# Altium PCB Robonaut_main.PcbDoc
Units mm, origin at the board's own origin, x right, y up, seen from the top; angles counter-clockwise.
Board outline 110 x 130 mm, 2 copper layers (Top Layer, Bottom Layer), stack 1.586 mm thick; 55 components, 58 nets, 322 pads, 113 vias.
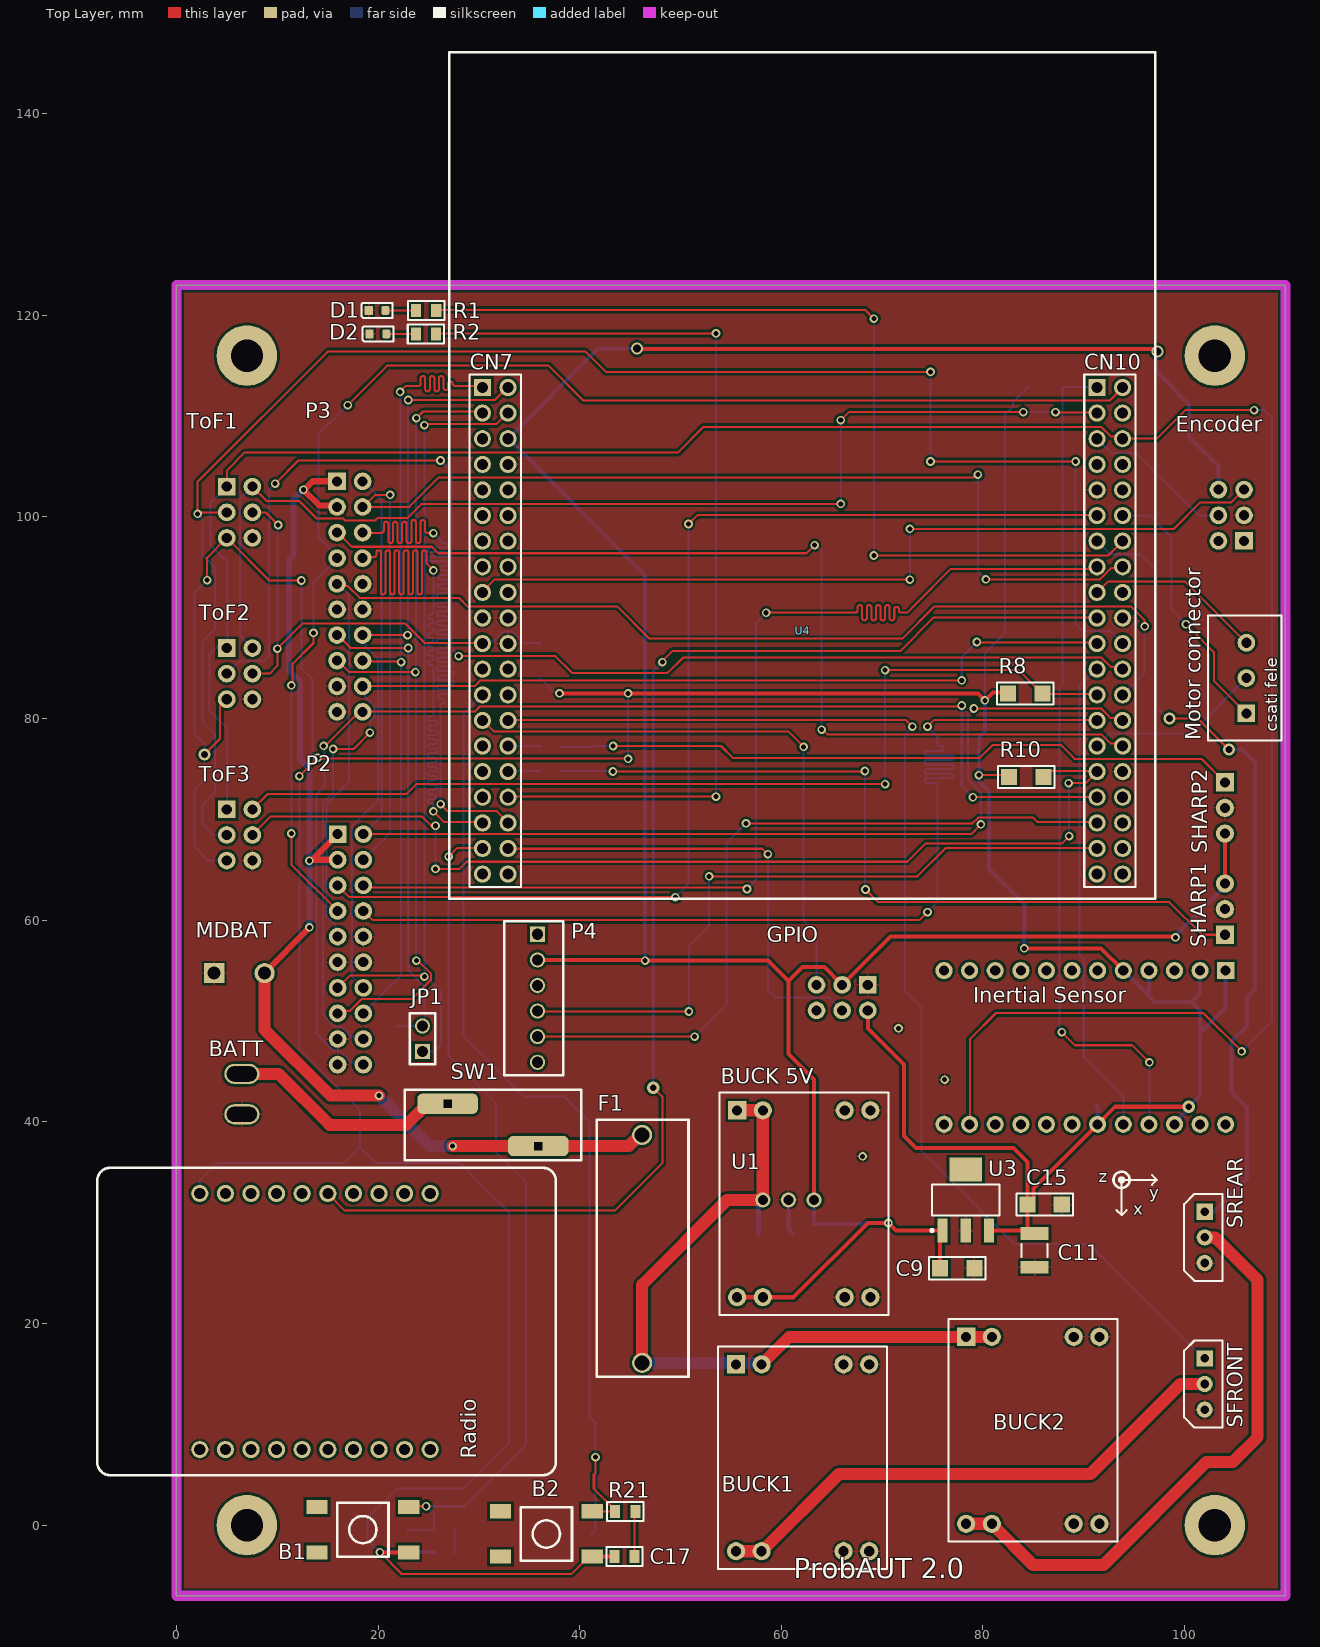
[diagram p0: Top Layer view]
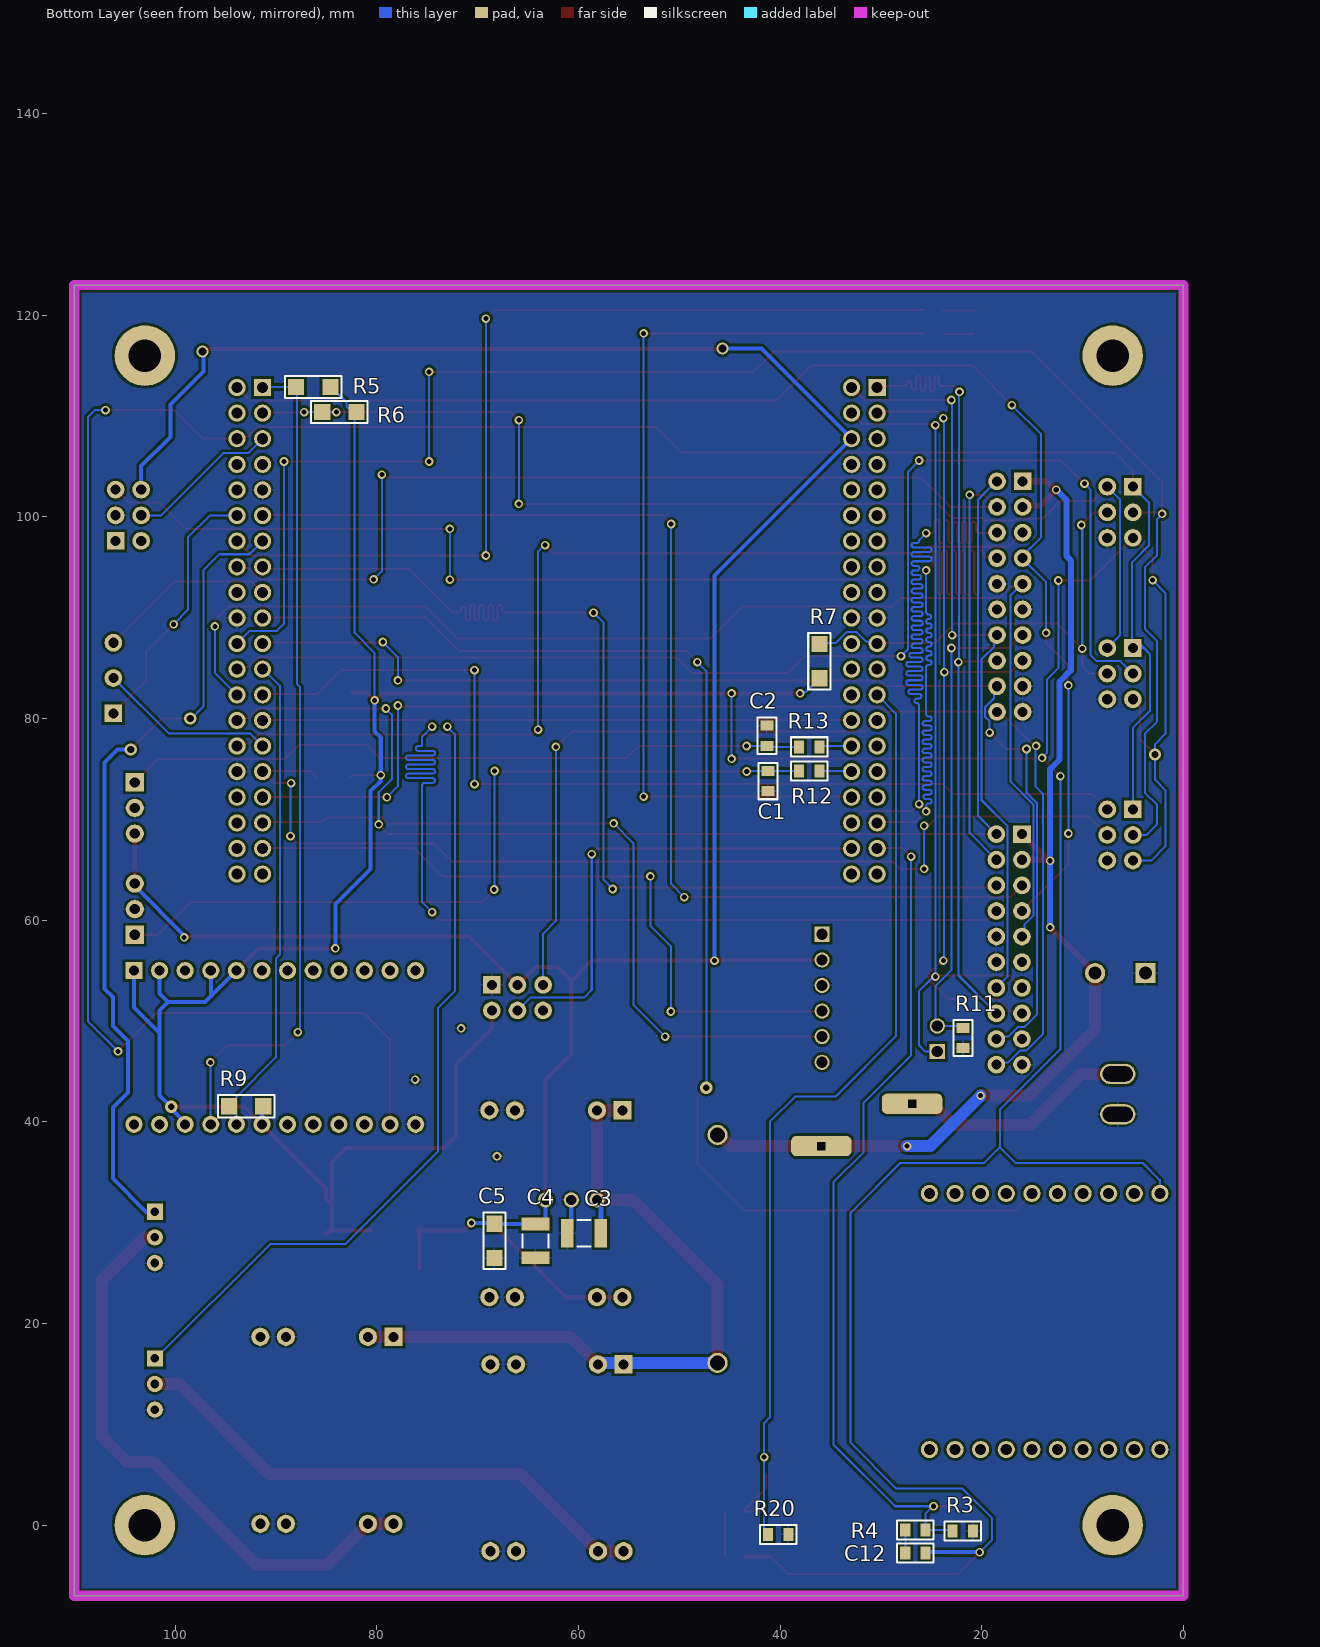
[diagram p1: Bottom Layer view, seen from below]
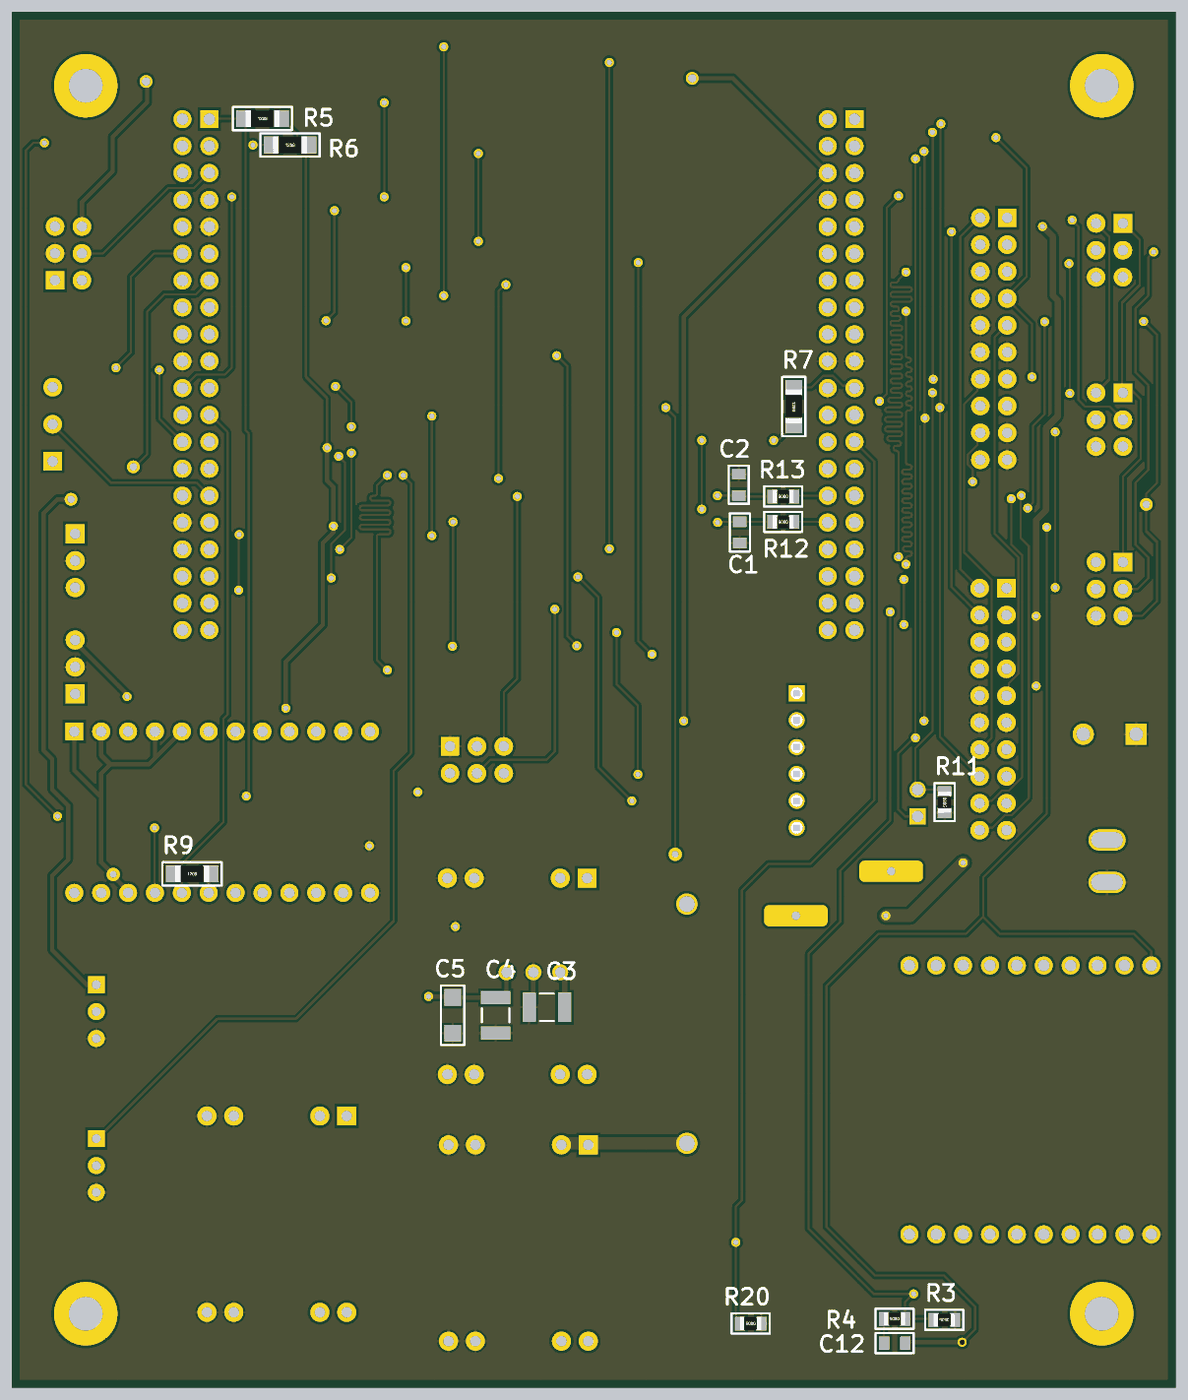
[diagram p2: 3D render of the assembled board from below, using the file's embedded part models]

## Layer stack, top to bottom
Top Solder: solder mask 0.0102, Solder Resist, Dk 3.5
Top Layer: signal copper 0.018
Dielectric1: core 1.55, FR-4, Dk 4.8
Bottom Layer: signal copper 0.018
Bottom Solder: solder mask 0.0102, Solder Resist, Dk 3.5

## Board outline
0,-7 110,-7 110,123 0,123

## Design rules (kind name [scope] priority, off if disabled: settings)
BoardOutlineClearance [All] p1: gap=0.25 ignorepadtopadclearanceinfootprint=FALSE except(0: Arc-SplitContinuation Track-SplitContinuation SMDPad-SplitContinuation THPad-SplitContinuation Via-SplitContinuation Fill-SplitContinuation Poly-SplitContinuation Region-SplitContinuation Text-SplitContinuation)
Clearance poly_clearance [InNamedPolygon('top_GND') Or InNamedPolygon('bottom_GND')] p1: gap=0.254 ignorepadtopadclearanceinfootprint=FALSE except(0: Arc-Hole Track-Hole SMDPad-Hole THPad-Hole Via-Hole Fill-Hole Poly-Hole Region-Hole Text-Hole)
Clearance Clearance-xPP-xTP-xTT [All] p2: gap=0.15 ignorepadtopadclearanceinfootprint=TRUE except(0: Arc-Hole Track-Hole SMDPad-Hole THPad-Hole Via-Hole Fill-Hole Poly-Hole Region-Hole Text-Hole)
ComponentClearance [All] p1: gap=0.25 collisioncheckmode=3 verticalgap=0.25 showdistances=FALSE
DiffPairsRouting [All] p1: maxlimit=0.25 minlimit=0.25 mostfreqgap=0.25 toplayer_minwidth=0.381 toplayer_maxwidth=0.381 toplayer_prefwidth=0.381 bottomlayer_minwidth=0.381 bottomlayer_maxwidth=0.381 bottomlayer_prefwidth=0.381 maxuncoupledlength=12.5
Height [All] p1: minheight=0 maxheight=25 prefheight=12.5
HoleSize HoleSize-PTH [All] p1: absolutevalues=TRUE maxlimit=2 minlimit=0.25 maxpercent=80.000 minpercent=20.000
HoleToHoleClearance [All] p1: gap=0.35 allowstackedmicrovias=TRUE
MinimumAnnularRing "Minimum IAR  >0.45mm" [((ObjectKind = 'Pad') OR (ObjectKind = 'Via')) And (Layer = 'MultiLayer') And (HoleDiameter > AsMM(0.45))] p1: minimumring=0.175 // minimum inner annular ring for pads > 0.45mm finished hole size
MinimumAnnularRing "Minimum IAR <=0.45mm" [((ObjectKind = 'Pad') OR (ObjectKind = 'Via')) And (Layer = 'MultiLayer') And (HoleDiameter <= AsMM(0.45))] p2: minimumring=0.175 // minimum inner annular ring for pads <= 0.45mm finished hole size
MinimumSolderMaskSliver [All] p1: minsoldermaskwidth=0.08
PlaneClearance PlaneClearance-IPI [All] p1: clearance=0.25
PlaneConnect [All] p1: planeconnectstyle=Relief reliefexpansion=0.175 reliefentries=4 reliefconductorwidth=0.2 reliefairgap=0.2
PolygonConnect PolygonConnect-xTW [All] p1: connectstyle=Relief reliefconductorwidth=0.2 reliefentries=4 polygonreliefangle="90 Angle" airgapwidth=0.2
RoomDefinition U_main_board [InComponentClass('U_main_board')] p1: confinementstyle=ConfineIn formatcopy=TRUE lockcomponents=FALSE outline -250,-250 -199.2,-250 -199.2,-224.6 -250,-224.6
RoomDefinition U_I2C [InComponentClass('U_I2C')] p2: confinementstyle=ConfineIn formatcopy=TRUE lockcomponents=FALSE outline -250,-250 -199.2,-250 -199.2,-224.6 -250,-224.6
RoomDefinition U_Connectors [InComponentClass('U_Connectors')] p3: confinementstyle=ConfineIn formatcopy=TRUE lockcomponents=FALSE outline -250,-250 -199.2,-250 -199.2,-224.6 -250,-224.6
RoomDefinition U_Power [InComponentClass('U_Power')] p4: confinementstyle=ConfineIn formatcopy=TRUE lockcomponents=FALSE outline -250,-250 -199.2,-250 -199.2,-224.6 -250,-224.6
RoutingCorners [All] p1: cornerstyle=45-Degree minsetback=2.5 maxsetback=2.5
RoutingVias "RoutingVias > 0.45mm" [(ObjectKind = 'Via') And (HoleDiameter > AsMM(0.45))] p1: holewidth=0.5 width=0.85 viastyle="Through Hole" minholewidth=0.5 minwidth=0.85 maxholewidth=0.9 maxwidth=1.25 // finishet hole size > 0.45mm
RoutingVias "RoutingVias <= 0.45mm" [(ObjectKind = 'Via') And (HoleDiameter <= AsMM(0.45))] p2: holewidth=0.3 width=0.65 viastyle="Through Hole" minholewidth=0.25 minwidth=0.6 maxholewidth=0.45 maxwidth=0.8 // finishet hole size <= 0.45mm
SilkToSilkClearance [All] p1: silktosilkclearance=0.2
SilkToSolderMaskClearance SilkscreenOverComponentPads [IsPad] p1: minsilkscreentomaskgap=0.2 clearancetoexposedcopper=TRUE
SolderMaskExpansion [All] p1: expansion=0 istentingtop=FALSE
UnRoutedNet [All] p1: checkbadconnections=TRUE
Width Width-xTW [All] p1: maxlimit=1.5 minlimit=0.15 preferedwidth=0.2
18 further rules are at their usual default settings.

## Classes and differential pairs
component class U_Power: BATT BUCK1 BUCK2 "BUCK 5V" C3 C4 C5 C9 C11 C15 F1 SW1 U1 U3
component class U_main_board: B1 B2 C12 C17 D1 D2 JP1 P2 P3 P4 R1 R2 R3 R4 R5 R6 R7 R8 R9 R10 R11 R20 R21 U4
component class U_I2C: "Inertial Sensor" ToF1 ToF2 ToF3
component class U_Connectors: C1 C2 Encoder GPIO MDBAT "Motor connector" R12 R13 Radio SFRONT SHARP1 SHARP2 SREAR

## Components (designator, comment, footprint, x,y, rotation, side; value= is the part's Value field where it differs from the comment)
B1 "Button" FP_BTN_SMD 18.5,-0.45 r90 top
B2 "Button" FP_BTN_SMD 36.7,-0.875 r90 top
BATT "Connector_Battery" CONN_BATT_LiPo_ 6.5,39.75 r270 top
BUCK1 "BUCK" BUCK 55.515,-1.825 r0 top
BUCK2 "BUCK" BUCK 78.34,0.9 r0 top
"BUCK 5V" "BUCK" BUCK 55.626,23.368 r0 top
C1 "100nF" FP_0805_CAP_085 41.2,73.8 r90 bottom
C2 "100nF" FP_0805_CAP_085 41.3,78.3 r270 bottom
C3 "10uF" FP_1210_CAP 59.436,28.956 r180 bottom
C4 "22uF" FP_1210_CAP 64.262,28.194 r90 bottom
C5 "100nF" FP_1206_CAP_125 68.326,28.194 r90 bottom
C9 "1uF" FP_1206_CAP_125 77.45,25.475 r180 top
C11 "22uF" FP_1210_CAP 85.125,27.25 r90 top
C12 "100nF" FP_0805_CAP_085 26.575,-2.775 r180 bottom
C15 "100nF" FP_1206_CAP_125 86.125,31.8 r180 top
C17 "100nF" FP_0805_CAP_085 44.45,-3.125 r180 top
D1 "LED" FP_0805_LED_RED 19.907,120.487 r180 top
D2 "LED" FP_0805_LED_RED 20,118.15 r180 top
Encoder "Connector" FP_CONN6PIN_2X3_254 105.9,102.705 r180 top
F1 "Fuse 5A" PTF/16_FUSE_HOLDER 46.2,23.7 r270 top
GPIO "Connector" FP_CONN6PIN_2X3_254 63.5,53.594 r270 top
"Inertial Sensor" "STEVAL-MKI178V1" STEVAL-MKI178V1 76.14,55 r270 top
JP1 "JUMPER" FP_CONN2_TUSKE_254MM 24.4,46.975 r0 top
MDBAT "Connector" CONN_2pin 8.75,54.75 r90 top
"Motor connector" "Connector" "sorkapocs 3 pin" 106.125,80.525 r90 top
P2 "Line Sensor Front" FP_CONN20PINS_LOMEX 16,68.54 r0 top
P3 "Line Sensor Rear" FP_CONN20PINS_LOMEX 15.935,103.53 r0 top
P4 "HC-05" FP_CONN6_TAP_254MM 35.825,58.61 r180 top
R1 "200" FP_0805_RES 24.775,120.475 r0 top
R2 "200" FP_0805_RES 24.75,118.15 r0 top
R3 "10K" FP_0805_RES 21.875,-0.575 r0 bottom
R4 "1K" FP_0805_RES 26.575,-0.475 r0 bottom
R5 "4K7" FP_1206_RES 86.3,112.9 r180 bottom
R6 "4K7" FP_1206_RES 83.7,110.4 r180 bottom
R7 "4K7" FP_1206_RES 36.1,85.7 r270 bottom
R8 "4K7" FP_1206_RES 84.2,82.5 r180 top
R9 "4K7" FP_1206_RES 92.951,41.55 r180 bottom
R10 "4K7" FP_1206_RES 84.3,74.2 r0 top
R11 "1K" FP_0805_RES 21.85,48.325 r270 bottom
R12 "1K" FP_0805_RES 37.1,74.8 r0 bottom
R13 "1K" FP_0805_RES 37.1,77.2 r0 bottom
R20 "10K" FP_0805_RES 40.175,-0.925 r0 bottom
R21 "1K" FP_0805_RES 44.525,1.35 r0 top
Radio "SLTB004A" SLTB004A 37.626,4.96 r90 top
SFRONT "SERVO connector" RC_SERVO_CONN 102,16.54 r270 top
SHARP1 "SHARP TOF" "SHARP TOF" 104,58.56 r90 top
SHARP2 "SHARP TOF" "SHARP TOF" 104,73.68 r270 top
SREAR "SERVO connector" RC_SERVO_CONN 102,31.08 r270 top
SW1 "Main" FP_SWITCH_4.8X0.8 31.4,39.7 r0 top
ToF1 "Connector" FP_CONN6PIN_2X3_254 5,97.92 r0 top
ToF2 "Connector" FP_CONN6PIN_2X3_254 5,81.92 r0 top
ToF3 "Connector" FP_CONN6PIN_2X3_254 5,65.92 r0 top
U1 "V7805-2000" V7805-2000_Buck 60.706,29.718 r270 top
U3 "MCP1755S-3302E/DB" MCP1755S-3302E/DB_LDO 78.3,32.25 r90 top
U4 "NUCLEO-F446RE" FP_NUCLEO-64_2x20 30.36,112.84 r0 top

## Footprints (in the part's own frame and the unit in brackets; to place one, negate y for a bottom-side part, rotate by r counter-clockwise, add the part's x,y. Pads: shape width x height; smd on the part's side, far side on the other; paste and mask are expansions set on the pad)
BUCK [mm]
  rect 1.8x1.8 hole 1: 1(0,17.78)
  round 1.8 hole 1: 2(2.54,17.78) 3(10.668,17.78) 4(13.208,17.78) 5(0,-0.762) 6(2.54,-0.762) 7(10.668,-0.762) 8(13.208,-0.762)
  silkscreen extent -1.78,-2.54 14.99,19.56
CONN_2pin [mm] "MKDS 3/ 2"
  rect 2x2 hole 1.3: 1(0,5)
  round 2 hole 1.3: 2(0,0)
CONN_BATT_LiPo_ [mm]
  oval 2x3.5 hole 1.5 slot 3 at 90 deg: 1(-5,0) 2(-1,0)
FP_0805_CAP_085 [mm] "0805 kapacitás YAGEO 0.85mm magas"
  rect 1x1.3 smd: 1(-1,0) 2(1,0)
  silkscreen extent -1.8,-0.95 1.8,0.95, body extent -1,-0.64 1.03,0.64, height 0.85
FP_0805_LED_RED [mm] "0805 méretű piros LED"
  rrect50% 0.8x0.9 smd: A(-0.825,0)
  rect 0.8x0.9 smd: K(0.825,0)
  silkscreen extent -1.55,-0.75 1.53,0.75, body extent -1,-0.62 1.02,0.62, height 1.1
FP_0805_RES [mm] "0805 ellenállás"
  rect 1x1.3 smd: 1(-1,0) 2(1,0)
  silkscreen extent -1.8,-0.95 1.8,0.95, body extent -1,-0.62 1,0.63, height 0.62
FP_1206_CAP_125 [mm] "1206 kapacitás 1.25 mm"
  rect 1.6x1.6 smd: 1(-1.7,0) 2(1.7,0)
  silkscreen extent -2.8,-1.1 2.8,1.1, body extent -1.52,-0.79 1.58,0.79, height 1.25
FP_1206_RES [mm] "1206 ellenállás"
  rect 1.6x1.6 smd: 1(-1.7,0) 2(1.7,0)
  silkscreen extent -2.8,-1.1 2.8,1.1, body extent -1.6,-0.8 1.6,0.8, height 0.62
FP_1210_CAP [mm] "CAP"
  rect 1.25x2.8 smd: 1(-1.675,0) 2(1.675,0)
  silkscreen extent -0.65,-1.3 0.65,1.3, body extent -1.75,-1.35 1.75,1.35, height 2.5
FP_BTN_SMD [mm] "SMD Push Button 6x6mm"
  rect 1.4x2.1 smd: 1(2.25,4.55) 2(2.25,-4.55) 3(-2.25,4.55) 4(-2.25,-4.55)
  silkscreen extent -2.67,-2.54 2.67,2.54, body extent -3,-5 3,5, height 5.1
FP_CONN2_TUSKE_254MM [mm] "2×1 tüskesor"
  rect 1.5x1.5 hole 1.1: 1(0,0)
  round 1.5 hole 1.1: 2(0,2.54)
  silkscreen extent -1.27,-1.27 1.27,3.81, body extent -1.27,-1.27 1.27,3.81, height 8.54
FP_CONN6_TAP_254MM [mm] "álló hat pólusú tápcsatlakozó 2.54mm"
  rect 1.5x1.5 hole 1.1: 1(0,0)
  round 1.5 hole 1.1: 2(0,2.54) 3(0,5.08) 4(0,7.62) 5(0,10.16) 6(0,12.7)
  silkscreen extent -2.54,-1.27 3.3,13.97, body extent -2.52,-1.27 3.28,13.97, height 11.56
FP_CONN6PIN_2X3_254 [mm] "6 pin csatlakozó 2 x 3 tüske"
  rect 1.75x1.75 hole 1: 1(0,5.08)
  round 1.75 hole 1: 2(2.54,5.08) 3(0,2.54) 4(2.54,2.54) 5(0,0) 6(2.54,0)
FP_CONN20PINS_LOMEX [mm]
  rect 1.75x1.75 hole 1: 1(0,0)
  round 1.75 hole 1: 2(2.54,0) 3(0,-2.54) 4(2.54,-2.54) 5(0,-5.08) 6(2.54,-5.08) 7(0,-7.62) 8(2.54,-7.62) 9(0,-10.16) 10(2.54,-10.16) 11(0,-12.7) 12(2.54,-12.7) 13(0,-15.24) 14(2.54,-15.24) 15(0,-17.78) 16(2.54,-17.78) 17(0,-20.32) 18(2.54,-20.32) 19(0,-22.86) 20(2.54,-22.86)
FP_NUCLEO-64_2x20 [mm]
  round 1.7 hole 1.1: 0(0,-48.26) 0(2.54,-48.26) 0(60.96,-48.26) 0(63.5,-48.26) 2(2.54,0) 3(0,-2.54) 4(2.54,-2.54) 5(0,-5.08) 6(2.54,-5.08) 7(0,-7.62) 8(2.54,-7.62) 9(0,-10.16) 10(2.54,-10.16) 11(0,-12.7) 12(2.54,-12.7) 13(0,-15.24) 14(2.54,-15.24) 15(0,-17.78) 16(2.54,-17.78) 17(0,-20.32) 18(2.54,-20.32) 19(0,-22.86) 20(2.54,-22.86) 21(0,-25.4) 22(2.54,-25.4) 23(0,-27.94) 24(2.54,-27.94) 25(0,-30.48) 26(2.54,-30.48) 27(0,-33.02) 28(2.54,-33.02) 29(0,-35.56) 30(2.54,-35.56) 31(0,-38.1) 32(2.54,-38.1) 33(0,-40.64) 34(2.54,-40.64) 35(0,-43.18) 36(2.54,-43.18) 37(0,-45.72) 38(2.54,-45.72) 40(63.5,0) 41(60.96,-2.54) 42(63.5,-2.54) 43(60.96,-5.08) 44(63.5,-5.08) 45(60.96,-7.62) 46(63.5,-7.62) 47(60.96,-10.16) 48(63.5,-10.16) 49(60.96,-12.7) 50(63.5,-12.7) 51(60.96,-15.24) 52(63.5,-15.24) 53(60.96,-17.78) 54(63.5,-17.78) 55(60.96,-20.32) 56(63.5,-20.32) 57(60.96,-22.86) 58(63.5,-22.86) 59(60.96,-25.4) 60(63.5,-25.4) 61(60.96,-27.94) 62(63.5,-27.94) 63(60.96,-30.48) 64(63.5,-30.48) 65(60.96,-33.02) 66(63.5,-33.02) 67(60.96,-35.56) 68(63.5,-35.56) 69(60.96,-38.1) 70(63.5,-38.1) 71(60.96,-40.64) 72(63.5,-40.64) 73(60.96,-43.18) 74(63.5,-43.18) 75(60.96,-45.72) 76(63.5,-45.72)
  rect 1.7x1.7 hole 1.1: 1(0,0) 39(60.96,0)
  silkscreen extent -3.3,-50.72 66.72,33.25, body extent -3.3,-50.72 66.72,33.25, height 11
FP_SWITCH_4.8X0.8 [mm]
  rrect50% 6x2 hole 0.8 square: 1(-4.5,2.1) 2(4.5,-2.1)
  silkscreen extent -8.75,-3.5 8.75,3.5
MCP1755S-3302E/DB_LDO [mm]
  rect 2.35x1 smd: 1(-3.025,2.3) 2(-3.025,0) 3(-3.025,-2.3)
  rect 2.35x3.25 smd: 4(3.025,0)
  silkscreen extent -3.15,-3.35 1.55,3.47, body extent -1.85,-3.35 1.85,3.35, height 1.8
PTF/16_FUSE_HOLDER [mm]
  round 2 hole 1.5: 1(-15,0) 2(7.6,0)
  silkscreen extent -16.5,-4.5 9,4.6
RC_SERVO_CONN [mm] "RC servo connector, 3 pin 2.54 mm gap, orientation signed"
  rect 1.6x1.6 hole 0.85: 1(0,0)
  round 1.6 hole 0.85: 2(2.54,0) 3(5.08,0)
  silkscreen extent -1.78,-2.03 6.86,1.78
"SHARP TOF" [mm]
  rect 1.8x1.8 hole 1: 1(0,0)
  round 1.8 hole 1: 2(2.54,0) 3(5.08,0)
SLTB004A [mm] "Thunderboard Sense 2 module"
  round 1.7 hole 1.1: 1(2.54,35.306) 2(27.94,35.306) 3(2.54,32.766) 4(27.94,32.766) 5(2.54,30.226) 6(27.94,30.226) 7(2.54,27.686) 8(27.94,27.686) 9(2.54,25.146) 10(27.94,25.146) 11(2.54,22.606) 12(27.94,22.606) 13(2.54,20.066) 14(27.94,20.066) 15(2.54,17.526) 16(27.94,17.526) 17(2.54,14.986) 18(27.94,14.986) 19(2.54,12.446) 20(27.94,12.446)
  Top Layer pour cut-out: -2.032,38.1 -2.032,47.752 32.512,47.752 32.512,38.1
  Bottom Layer pour cut-out: -2.032,38.1 -2.032,47.752 32.512,47.752 32.512,38.1
  silkscreen extent 0,0 30.48,45.47, body extent 0,0 30.5,45.5, height 8.7
"sorkapocs 3 pin" [mm] "be kell allitani a pin mereteket de kapasnak jo lesz"
  rect 1.75x1.75 hole 1: 1(0,0)
  round 1.75 hole 1: 2(3.5,0) 3(7,0)
  silkscreen extent -2.7,-3.5 9.7,3.8
STEVAL-MKI178V1 [mm] "DIL24"
  rect 1.7x1.7 hole 1: 1(0,27.94)
  round 1.7 hole 1: 2(0,25.4) 3(0,22.86) 4(0,20.32) 5(0,17.78) 6(0,15.24) 7(0,12.7) 8(0,10.16) 9(0,7.62) 10(0,5.08) 11(0,2.54) 12(0,0) 13(15.24,0) 14(15.24,2.54) 15(15.24,5.08) 16(15.24,7.62) 17(15.24,10.16) 18(15.24,12.7) 19(15.24,15.24) 20(15.24,17.78) 21(15.24,20.32) 22(15.24,22.86) 23(15.24,25.4) 24(15.24,27.94)
V7805-2000_Buck [mm]
  round 1.5 hole 1: 1(-2.54,-2.54) 2(-2.54,0) 3(-2.54,2.54)

## Part data
B1 B2: library part "Button 4P", "Push button", Reference=https://hu.mouser.com/ProductDetail/TE-Connectivity-Alcoswitch/FSM2JSMAATR?qs=g%252BEszo6zu8MKdISiZRITCQ%3D%3D, Supplier=Mouser
C1 C2 C3 C4 C5 C9 C11 C12 C15 C17: library part CAP, "Capacitor"
  C3: Reference=https://hu.farnell.com/kemet/c1210c106k3ractu/cap-10-f-25v-10-x7r-1210/dp/1358512, Supplier=Farnell
  C4 C11: ComponentLink1Description=Supplier, ComponentLink1URL=https://hu.farnell.com/kemet/c1210c226k4ractu/cap-22-f-16v-10-x7r-1210/dp/2456343, Reference=https://hu.farnell.com/kemet/c1210c226k4ractu/cap-22-f-16v-10-x7r-1210/dp/2456343, Supplier=Farnell
  C5 C15: ComponentLink1Description=Supplier, ComponentLink1URL=https://hu.farnell.com/yageo/cc1206krx7r8bb104/cap-0-1-f-25v-10-x7r-1206/dp/644316?st=capacitor%20smd
  C9: ComponentLink1Description=Supplier, ComponentLink1URL=https://hu.farnell.com/multicomp/mcsh31b105k100ct/cap-1-f-10v-10-x7r-1206/dp/1856632, Reference=https://hu.farnell.com/multicomp/mcsh31b105k100ct/cap-1-f-10v-10-x7r-1206/dp/1856632, Supplier=Farnell
  C12 C17: Reference=https://hu.farnell.com/yageo/cc1206krx7r8bb104/cap-0-1-f-25v-10-x7r-1206/dp/644316?st=capacitor%20smd, Supplier=Farnell
D1 D2: "Typical RED GaAs LED"
Encoder GPIO ToF1 ToF2 ToF3: library part Connector_6pin, "6pin connector"
F1: library part Fuse, "Fuse"
JP1: library part JUMPER_CONN, "Jumper Wire (Connected)"
MDBAT: library part Connector_2pin, "2pin connector"
"Motor connector" SFRONT SREAR: library part Connector_3pin, "3pin connector"
P2 P3: library part 302-S201, "Conn Shrouded Header HDR 20 POS 2.54mm Solder ST Thru-Hole", Color=Black, Manufacturer="On-Shore Technology", Category="Headers and Wire Housings", ComponentLink1Description=https://datasheet.ciiva.com/742/302-sxxx-742190.pdf?src-supplier=Digi-Key, ComponentLink1URL=https://datasheet.ciiva.com/742/302-sxxx-742190.pdf?src-supplier=Digi-Key, Connector Type="Male Pin", Contact Plating=Gold, Contact Type="Male Pin", Manufacturer Part Number=302-S201, Mount="Through Hole", Number of Positions=20, Number of Rows=2, Packaging=Tray, Pitch=0.1inch, Pricing 1="1=0,48000, 10=0,40700, 160=0,31675, 480=0,27148, 960=0,22624, 4960=0,19392, 10080=0,18099 (USD)", RoHS=Yes, RoHS Compliant=Yes, Row Spacing=0.1inch, Series=302, Stock 1=299353, Supplier 1=Digi-Key, Termination=Solder
R1 R2 R3 R4 R5 R6 R7 R8 R9 R10 R11 R12 R13 R20 R21: library part RES, "Resistor"
  R3 R20: Reference=https://hu.farnell.com/multicomp/mcmr12x1002ftl/res-10k-1-0-25w-1206-ceramic/dp/2073878, Supplier=Farnell
  R4 R21: Reference=https://hu.farnell.com/te-connectivity/crgh1206j1k0/res-1k-5-0-5w-1206-thick-film/dp/2331865, Supplier=Farnell
  R5 R6 R7 R8 R9 R10: Reference=https://hu.farnell.com/yageo/rc1206fr-074k7l/res-4k7-1-0-25w-1206-thick-film/dp/9240985, Supplier=Farnell
Radio: "SiLabs Thunderboard Sense 2 module"
SW1: library part SWITCH
U1: "Module DC-DC 12VIN 1-OUT 5V 2A 10W 3-Pin SIP Module", Case/Package=SIP, Current - Output 1=2A, Manufacturer=CUI, Max Input Voltage=18V, Max Operating Temperature=85°C, Max Power Dissipation=10W, Min Input Voltage=7V, Min Operating Temperature=-40°C, Output Voltage=5V, Package Quantity=44, Supplier Part Number 1=102-2175-ND, Category="Board Mount Modules", ComponentLink1Description=http://www.mouser.com/ds/2/670/v78-2000-520517.pdf?src-supplier=Mouser, ComponentLink1URL=http://www.mouser.com/ds/2/670/v78-2000-520517.pdf?src-supplier=Mouser, ComponentLink2Description=https://www.cui.com/product/resource/digikeypdf/v78xx-2000.pdf?src-supplier=Digi-Key, ComponentLink2URL=https://www.cui.com/product/resource/digikeypdf/v78xx-2000.pdf?src-supplier=Digi-Key, ComponentLink3Description=http://www.cui.com/Product/Resource/FuturePDF/V78-2000.pdf?src-supplier=Future+Electronics, ComponentLink3URL=http://www.cui.com/Product/Resource/FuturePDF/V78-2000.pdf?src-supplier=Future+Electronics, Efficiency=91%, Features=OTP,SCP, Height=0.69inch, Isolation=Non-Isolated, Lead Free="Lead Free", Length=0.45inch, Manufacturer Part Number=V7805-2000, Max Output Current=2A, Mount="Through Hole", Number of Outputs=1, Output Power=10W, Packaging=Rail/Tube, Pricing 1="1=9,75000, 5=9,67800, 10=9,60400, 25=9,45600, 44=9,16045, 88=8,27398, 264=8,12625, 440=7,97850 (USD)", RoHS=Yes, RoHS Compliant=Yes, Series=V78-2000, Stock 1=11968, Supplier 1=Digi-Key, Voltage - Output 1=5V, Width=0.35inch
U3: "LDO Regulator Pos 3.3V 0.3A 3-Pin SOT-223", Case/Package=SOT-223-3, Dropout Voltage=300mV, Manufacturer=Microchip, Max Input Voltage=16V, Max Operating Temperature=125°C, Max Output Current=300mA, Min Input Voltage=3.6V, Min Operating Temperature=-40°C, Nominal Output Voltage=3.3V, Nominal Supply Current=68uA, Package Quantity=78, Power Supply Rejection Ratio (PSRR)=80dB, Quiescent Current=100uA, Supplier Part Number 1=7990389, Tolerance=2%, Accuracy=2%, Category="Voltage Regulators - Linear", ComponentLink1Description=https://datasheet.ciiva.com/48506/mcp1755s-eng-tds-48506837.pdf?src-supplier=Distrelec, ComponentLink1URL=https://datasheet.ciiva.com/48506/mcp1755s-eng-tds-48506837.pdf?src-supplier=Distrelec, ComponentLink2Description=https://datasheet.ciiva.com/22748/1697992-22748101.pdf?src-supplier=Element14, ComponentLink2URL=https://datasheet.ciiva.com/22748/1697992-22748101.pdf?src-supplier=Element14, ComponentLink3Description=https://datasheet.ciiva.com/24137/25160a-238586-24137546.pdf?src-supplier=Mouser, ComponentLink3URL=https://datasheet.ciiva.com/24137/25160a-238586-24137546.pdf?src-supplier=Mouser, Height=1.7mm, Lead Free="Lead Free", Length=6.7mm, Manufacturer Part Number=MCP1755S-3302E/DB, Mount="Surface Mount", Number of Outputs=1, Number of Pins=3, Output Current=300mA, Output Type=Fixed, Output Voltage=3.3V, Packaging=Bulk, Polarity=Positive, Pricing 1="10=0,94200 (USD)", REACH SVHC="No SVHC", RoHS=Yes, RoHS Compliant=Yes, Series=MCP1755, Stock 1=1, Supplier 1=RSComponents, Supply Current=68uA, Weight=0.008826oz, Width=3.7mm
U4: Name="Nucleo F446RE", Reference=NUCLEO, Supplier=Tanszék

## Free pads (board coordinates)
  round 6 hole 3.2: 1(7,0) 2(103,0) 3(103,116) 4(7,116)

## Via types
v1: diameter 0.85, hole 0.5, Top Layer to Bottom Layer, 106 vias
v2: diameter 1.2, hole 0.711, Top Layer to Bottom Layer, 3 vias
v3: diameter 1.2, hole 0.8, Top Layer to Bottom Layer, 2 vias
v4: diameter 1.25, hole 0.65, Top Layer to Bottom Layer, 2 vias

## Nets (pads, with @x,y where several pads share a name; then routed paths per layer and width w, separated by ;. In a path a pad name is that pad's centre, name@x,y a point inside that pad or via, vN(x,y) a via of type N, cw(c..) or ccw(c..) an arc to the next point about the centre after c; other vN are vias at no path point)
3V3: "Inertial Sensor.1" "Inertial Sensor.2" "Inertial Sensor.4" "Inertial Sensor.5" "Inertial Sensor.19" "Inertial Sensor.22" B1.4 B2.4 C11.2 C12.2 C15.2 C17.2 GPIO.2 R5.2 R6.2 R7.2 R8.2 R9.2 R10.1 Radio.2 ToF1.5 ToF2.5 ToF3.5 U3.3 | length 479.8
  Top Layer w0.2: v2(2.794,76.454) 4.318,77.978 4.318,81.238 ToF2.5 ; v1(3.048,93.726) 3.048,95.968 ToF1.5 9.22,93.7 v1(12.4,93.7) ; v1(12.2,74.3) v1(14,76.1) ; v1@13.915,76.185 v1(14,76.1) ; v1(20.193,-2.686) 20.207,-2.7 22.332,-4.825 39.2,-4.825 40.9,-3.125 B2.4 ; v1@44.8,76.05 14.05,76.05 v1(14,76.1) ; v1(79.6,74.4) 82.4,74.4 R10.1
  Top Layer w0.4: v1@20.207,-2.7 B1.4 ; v1(38,82.5) v1(44.8,82.5) 79.5,82.5 v1(80.2,81.8) 81,82.6 R8.2@82.4,82.6 ; B2.4 C17.2 ; GPIO.2 68.58,49.276 72.153,45.703 72.153,38.591 73.344,37.4 83.05,37.4 84.425,36.025 C15.2 ; U3.3 C11.2@84.65,29.225 ; v1(84.1,57.2) 91.72,57.2 93.92,55 ; C11.2 84.95,28.925 C11.2@84.65,29.225 ; v4(100.4,41.5) 93.12,41.5 91.38,39.76 85.025,33.405 85.025,32.4 C15.2 ; C15.2 84.425,29.45 C11.2@84.65,29.225
  Bottom Layer w0.2: Radio.2 2.32,34.22 4,35.9 16.6,35.9 18.2,37.5 ; v1(3.048,93.726) 1.778,92.456 1.778,78.486 2.794,77.47 v2(2.794,76.454) 2.794,73.914 1.778,72.898 1.778,67.322 3.18,65.92 ToF3.5 ; ToF2.5@4.88,81.92 ToF2.5 ; v1(12.2,74.3) 12.2,47.2 18.2,41.2 18.2,37.5 ; v1(12.4,93.7) 12.4,85 13.5,83.9 13.5,76.625 14,76.125 v1(14,76.1) ; v1@20.193,-2.668 18.958,-1.433 18.958,0.683 21.9,3.625 28.45,3.625 33,8.175 33,31 28.1,35.9 19.8,35.9 18.2,37.5 ; R7.2 37.476,82.624 37.876,82.624 v1(38,82.5) ; v1(44.8,76) v1(44.8,82.5) ; v1(80.2,81.8) 80.2,86.5 82.2,88.5 82.2,110.2 83,111 83,111.4 R5.2@84.5,112.9 ; 96.41,52.51 96.46,52.56
  Bottom Layer w0.4: v1@20.193,-2.668 v1(20.193,-2.686) 25.486,-2.686 C12.2 ; v1(80.2,81.8) 80.2,78.7 79.6,78.1 v1(79.6,74.4) 79.6,73.8 80.6,72.8 80.6,65.1 84.1,61.6 v1(84.1,57.2) ; R9.2 91.4,41.401 91.4,39.78 91.38,39.76 91.34,39.72 ; 93.92,55 96.41,52.51 97.02,51.9 100.7,51.9 ; 96.46,52.56 96.46,55 ; 99,39.76 99,39.93 100.4,41.33 v4(100.4,41.5) 101.54,42.64 101.54,48.82 ; 101.54,55 101.54,52.74 100.7,51.9 ; 104.08,55 104.08,51.36 101.54,48.82 ; 100.7,51.9 101.54,51.06 101.54,48.82
5V: "BUCK 5V.5" "BUCK 5V.6" C4.2 C5.2 C9.2 Encoder.6 GPIO.3 P4.2 SHARP1.3 SHARP2.3 U1.3 U3.1 U4.6 | length 282.4
  Top Layer w0.2: U3.1@75.6,29.7 U3.1@76,29.3 ; U3.1@75.75,29.05 U3.1@75.925,29.225
  Top Layer w0.4: P4.2@35.701,56 35.741,56.04 46.46,56.04 v1(46.5,56) 58.693,56 60.706,53.987 ; v3@45.7,116.65 97.05,116.65 v3(97.3,116.4) ; 55.626,22.606 58.166,22.606 61.214,22.606 68.58,29.972 v1(70.612,29.972) 71.359,29.225 75.75,29.225 75.925,29.225 U3.1 ; U1.3 63.246,44.196 60.706,46.736 60.706,53.987 ; C9.2 U3.1@75.75,29.05 ; v1(99.1,58.3) 99,58.4 70.846,58.4 GPIO.3 64.262,55.372 62.091,55.372 60.706,53.987 ; SHARP1.3 SHARP2.3
  Bottom Layer w0.4: U4.6@32.88,107.82 U4.6@32.92,107.78 ; U4.6 U4.6@32.92,107.78 ; v3(45.7,116.7) 41.84,116.7 U4.6@32.92,107.78 ; v1(46.5,56) 46.5,94.2 U4.6@32.92,107.78 ; U1.3 63.246,29.869 68.223,29.869 68.326,29.972 v1(70.612,29.972) ; v3@97.2,116.2 97.2,114.425 100.457,111.168 100.457,107.94 103.36,105.037 Encoder.6 ; v1(99.1,58.3) 99.1,58.5 104,63.4 SHARP1.3
"AD CS1": P2.7 P3.7 U4.40 | length 136.4
  Top Layer w0.2: v1(11.4,68.6) 11.4,65.52 P2.7 ; v1(11.4,83.3) 11.5,83.4 11.5,85.4 13.6,87.5 v1(13.6,88.5) ; v1(17,111.1) 20.9,115 36.925,115 40.375,111.55 92.57,111.55 U4.40
  Bottom Layer w0.2: v1(11.4,68.6) v1(11.4,83.3) ; v1(13.6,88.5) 13.6,93.52 16,95.92 16,96.1 14.1,98 14.1,108.2 v1(17,111.1)
"AD CS2": P2.9 P3.9 U4.64 | length 129.4
  Top Layer w0.2: P3.9@16,93.38 16.226,93.154 16.996,93.154 18.185,91.965 28.035,91.965 28.86,91.14 43.712,91.14 46.927,87.925 71.98,87.925 75.195,91.14 94.66,91.14 96.042,89.758 96.042,89.158 v1(96.05,89.15)
  Bottom Layer w0.2: P2.9 15.774,58.606 15.774,59.555 14.875,60.454 14.875,71.48 17.125,73.73 17.125,92.255 P3.9@16,93.38 ; U4.64@93.84,82.42 93.92,82.42 96.05,84.55 v1(96.05,89.15)
"AD CS3": P2.2 P3.2 U4.66 | length 125.7
  Top Layer w0.2: P2.2 78.84,68.54 v1(79.8,69.5) ; v1(79.1,81) 91.736,81 92.69,80.046 93.674,80.046 U4.66@93.84,79.88
  Bottom Layer w0.2: P2.2 20.365,70.365 20.365,101.715 P3.2@18.54,103.54 ; v1(79.1,81) 78.5,80.4 78.5,74 79.8,72.7 v1(79.8,69.5)
"AD CS4": P2.4 P3.4 U4.54 | length 127.6
  Top Layer w0.2: v1(21.2,102.2) 19.74,102.2 18.54,101 23.1,101 26.025,103.925 79.058,103.925 79.333,104.2 v1(79.5,104.2) ; v1(80.3,93.8) 91.6,93.8 91.98,94.18 ccw(c91.32,95.06) 92.2,94.4 92.754,94.954 93.674,94.954 U4.54@93.84,95.12
  Bottom Layer w0.2: P2.4 21.2,68.66 v1(21.2,102.2) ; v1(79.5,104.2) 79.5,94.6 v1(80.3,93.8)
"BT RX": P4.4 U4.75 | length 68.8
  Top Layer w0.2: P4.4@35.875,50.95 v1(50.825,50.95) ; v1(52.85,64.35) 73.507,64.35 76.337,67.18 U4.75@91.3,67.18
  Bottom Layer w0.2: v1(50.825,50.95) 50.825,57.425 52.85,59.45 v1(52.85,64.35)
"BT TX": P4.5 U4.73 | length 74.1
  Top Layer w0.2: P4.5 v1(51.4,48.45) ; v1(56.5,69.6) 78.945,69.6 79.52,70.175 84.98,70.175 85.435,69.72 U4.73@91.3,69.72
  Bottom Layer w0.2: v1(51.4,48.45) 54.55,51.6 54.55,67.65 v1(56.5,69.6)
GND: "BUCK 5V.3" "BUCK 5V.4" "BUCK 5V.7" "BUCK 5V.8" "Inertial Sensor.13" BATT.2 BUCK1.3 BUCK1.4 BUCK1.7 BUCK1.8 BUCK2.3 BUCK2.4 BUCK2.7 BUCK2.8 C1.1 C2.1 C3.1 C4.1 C5.1 C9.1 C11.1 C15.1 D1.K D2.K Encoder.3 GPIO.1 MDBAT.1 P2.10 P2.11 P2.12 P2.17 P2.19 P3.10 P3.11 P3.12 P3.17 P3.19 P4.3 R3.1 R11.2 R20.1 Radio.1 SFRONT.3 SHARP1.2 SHARP2.2 SREAR.3 ToF1.6 ToF2.6 ToF3.6 U1.2 U3.2 U4.8 U4.19 U4.20 U4.22 U4.47 U4.58 U4.70 | length 3.5
  Bottom Layer w0.4: U1.2 60.706,29.361 C3.1
  other v1: 68.072,36.576 76.2,44.196 71.628,49.276
INETRIAL_INTERRUPT: "Inertial Sensor.14" ToF1.1 ToF2.1 ToF3.1 U4.44 | length 247.4
  Top Layer w0.2: ToF1.1 5,104.6 6.8,106.4 49.761,106.4 52.281,108.92 91.756,108.92 92.69,107.986 93.674,107.986 U4.44@93.84,107.82 ; 78.68,39.76 78.7,39.78 78.7,48.2 81.3,50.8 101.854,50.8 v1(105.664,46.99) ; U4.44 97.244,107.76 100.084,110.6 v1(106.9,110.6)
  Bottom Layer w0.2: ToF2.1@4.45,87.55 3.9,87 ; ToF3.1 5,79.074 3.302,80.772 3.302,86.402 3.9,87 ; ToF1.1 3.4,101.4 3.4,97.184 5.08,95.504 5.08,87.08 ToF2.1 3.9,87 ; v1(105.664,46.99) 108.661,49.987 108.661,109.906 107.967,110.6 v1(106.9,110.6)
"INF LE": P2.18 P3.18 U4.59 | length 117.3
  Top Layer w0.2: v1(15.549,76.984) 17.584,76.984 v1(19.2,78.6) ; P3.18@18.54,83.22 29.584,83.22 30.164,83.8 v1(77.9,83.8) ; v1(79.4,87.6) 79.45,87.55 91.25,87.55 U4.59@91.3,87.5
  Bottom Layer w0.2: v1(15.549,76.984) 15.549,72.649 14.525,71.625 14.525,50.644 15.764,49.405 16.406,49.405 17.365,48.446 18.314,48.446 P2.18 ; P3.18@18.54,83.22 18.766,82.994 18.766,82.045 19.665,81.146 19.665,80.193 19.2,79.728 v1(19.2,78.6) ; v1(77.9,83.8) 77.9,86.1 v1(79.4,87.6)
"INF OE": P2.20 P3.20 U4.71 | length 121.7
  Top Layer w0.2: v1(14.6,77.3) 14.776,77.3 18.156,80.68 18.54,80.68 29.584,80.68 30.104,81.2 77.8,81.2 v1(77.9,81.3) ; v1(79,72.2) 79.03,72.23 91.27,72.23 U4.71@91.3,72.26
  Bottom Layer w0.2: v1(14.6,77.3) 14.675,77.225 14.675,73.275 13.9,72.5 13.9,48.729 15.534,47.095 16.176,47.095 17.365,45.906 18.314,45.906 P2.20 ; v1(77.9,81.3) 77.9,73.3 v1(79,72.2)
"LED LE": P2.14 P3.14 U4.2 | length 75.3
  Top Layer w0.2: P3.14@18.54,88.3 18.553,88.288 22.912,88.288 v1(22.925,88.275) ; v1(23,111.6) 31.58,111.6 U4.2@32.88,112.9
  Bottom Layer w0.2: P2.14 17.415,54.425 17.415,69.325 20.015,71.925 20.015,85.876 18.766,87.125 18.766,88.074 P3.14@18.54,88.3 ; v1(22.925,88.275) 22.962,88.313 22.962,111.562 v1(23,111.6)
"LED OE": JP1.1 P2.13 U4.4 | length 82.2
  Top Layer w0.2: P2.13 17.2,54.5 24.5,54.5 v1(24.6,54.4) ; v1(24.6,109.1) 24.7,109.2 31.74,109.2 U4.4@32.834,110.294
  Bottom Layer w0.2: JP1.1 25.575,46.975 26.225,47.625 26.225,52.951 24.776,54.4 v1(24.6,54.4) v1(24.6,109.1)
NetB1_2: B1.2 R3.2 R4.1 U4.37 | length 84.8
  Top Layer w0.2: B1.2 23.125,1.875 v1(24.775,1.875) ; v1(27,66.3) 27.88,67.18 U4.37@30.34,67.18
  Bottom Layer w0.2: R3.2 22.975,-0.475 R4.1 25.575,1.15 v1@24.85,1.875 ; v1(24.775,1.875) v1@24.85,1.875 ; v1(27,66.3) 27,46.6 31.7,41.9 31.7,37 34.7,34 34.7,8 28.575,1.875 v1@24.85,1.875
NetB2_2: B2.2 R20.2 R21.1 U4.25 | length 100.6
  Top Layer w0.2: B2.2 43.5,1.375 R21.1 43.525,1.5 41.399,3.626 41.399,5.012 41.575,5.188 v1(41.575,6.75)
  Bottom Layer w0.2: U4.25 28.5,80.5 28.5,48.5 34.5,42.5 38.5,42.5 41,40 41,10.7 41.575,10.125 v1(41.575,6.75) 41.575,-0.525 R20.2
NetBATT_1: BATT.1 SW1.1 | length 23.4
  Top Layer w1.2: BATT.1 10.15,44.75 15.2,39.7 22.8,39.7 24.9,41.8 SW1.1
NetBUCK1_1: "BUCK 5V.1" "BUCK 5V.2" BUCK1.1 BUCK1.2 BUCK2.1 BUCK2.2 C3.2 F1.2 U1.1 | length 74.2
  Top Layer w1.2: F1.2@46.272,16.028 F1.2 46.2,23.848 54.61,32.258 U1.1 58.166,41.148 55.626,41.148 ; BUCK1.2@57.982,16.028 BUCK1.2 60.78,18.68 BUCK2.1 BUCK2.2
  Bottom Layer w0.5: C3.2@57.761,28.941 57.761,31.853 U1.1
  Bottom Layer w1.2: F1.2 57.91,16.1 BUCK1.2
NetC1_2: C1.2 R12.2 SHARP1.1 | length 79.7
  Top Layer w0.2: v1@43.3,74.74 68.3,74.74 v1@68.4,74.74 ; v1(68.35,63.05) 69.6,61.8 98.5,61.8 101.74,58.56 SHARP1.1
  Bottom Layer w0.2: R12.2 C1.2 43.25,74.8 v1(43.3,74.75) ; v1(68.3,74.8) 68.3,63.1 v1(68.35,63.05) v1@68.4,63
NetC2_2: C2.2 R13.2 SHARP2.1 | length 68.5
  Top Layer w0.2: v1(43.32,77.28) 54.02,77.28 55.2,76.1 79.7,76.1 81,77.4 87.7,77.4 89.1,76 101.68,76 SHARP2.1
  Bottom Layer w0.2: R13.2 41.2,77.2 C2.2 43.3,77.3 v1(43.32,77.28)
NetC12_1: C12.1 R4.2 | length 2.3
  Bottom Layer w0.2: C12.1 R4.2
NetC17_1: C17.1 R21.2 | length 4.5
  Top Layer w0.2: C17.1 45.45,1.275 R21.2
NetD1_1: D1.A R1.1 | length 3
  Top Layer w0.2: D1.A 23.763,120.487 R1.1
NetD2_1: D2.A R2.1 | length 2.9
  Top Layer w0.2: D2.A R2.1
NetEncoder_4: Encoder.4 U4.43 | length 15.2
  Bottom Layer w0.2: U4.43 92.755,106.325 95.225,106.325 101.385,100.165 Encoder.4
NetEncoder_5: Encoder.5 U4.17 | length 82.7
  Top Layer w0.2: U4.17@30.34,92.58 31.54,93.78 v1(72.75,93.78) ; v1(72.75,98.825) 98.95,98.825 101.575,101.45 104.645,101.45 Encoder.5
  Bottom Layer w0.2: v1(72.75,93.78) v1(72.75,98.825)
NetGPIO_4: GPIO.4 U4.38 | length 47.7
  Top Layer w0.2: U4.38@32.88,67.18 32.97,67.09 58.132,67.09 v1(58.674,66.548)
  Bottom Layer w0.2: v1(58.674,66.548) 58.674,53.086 59.436,52.324 64.77,52.324 GPIO.4
NetGPIO_5: GPIO.5 U4.27 | length 57.1
  Top Layer w0.2: U4.27@30.34,79.88 31.52,78.7 60.725,78.7 v1(62.225,77.2)
  Bottom Layer w0.2: v1(62.225,77.2) 62.225,59.949 63.5,58.674 GPIO.5
"NetInertial Sensor_20": "Inertial Sensor.20" R9.1 U4.61 | length 47.7
  Bottom Layer w0.2: U4.61@91.3,84.96 89.6,83.26 89.6,56.6 90,56.2 90,46.4 93.9,42.5 93.92,42.48 93.92,39.76
"NetInertial Sensor_21": "Inertial Sensor.21" R5.1 U4.39 | length 83.7
  Top Layer w0.2: v1(87.828,48.9) 89.128,47.6 94.8,47.6 v1(96.5,45.9)
  Bottom Layer w0.2: v1(87.828,48.9) 87.828,49.076 87.6,49.304 87.6,83.126 87.9,83.426 87.9,112.9 U4.39@91.3,112.9 ; 96.46,39.76 96.5,39.8 v1(96.5,45.9)
NetJP1_2: JP1.2 P3.13 R11.1 | length 48.4
  Top Layer w0.2: P3.13@16,88.3 17.3,87 v1(23,87)
  Bottom Layer w0.2: P3.13@16,88.125 P3.13@16,88.3 ; R11.1@21.875,49.4 21.99,49.515 JP1.2 ; v1(23,87) 23,55.045 24.6,53.445 JP1.2@24.6,49.525
"NetMotor connector_1": "Motor connector.1" U4.50 | length 26.3
  Top Layer w0.2: v1(100.143,89.357) 100.7,88.8 102.9,86.6 102.9,83.75 106.125,80.525
  Bottom Layer w0.2: U4.50 96.56,100.14 98.725,97.975 98.725,90.775 v1(100.143,89.357)
"NetMotor connector_2": "Motor connector.2" U4.67 | length 17.6
  Bottom Layer w0.2: U4.67 92.54,78.5 100.6,78.5 106.125,84.025
"NetMotor connector_3": "Motor connector.3" U4.55 | length 17.8
  Top Layer w0.2: U4.55 92.42,93.62 100.03,93.62 106.125,87.525
NetR1_2: R1.2 U4.52 | length 92.5
  Top Layer w0.2: R1.2@25.775,120.55 68.3,120.55 v1(69.175,119.675) ; v1(69.175,96.175) 92.435,96.175 U4.52
  Bottom Layer w0.2: v1(69.175,96.175) v1(69.175,119.675)
NetR2_2: R2.2 U4.34 | length 94.4
  Top Layer w0.2: R2.2@25.75,118.2 v1(53.525,118.2) ; U4.34@32.88,72.26 v1(53.525,72.259)
  Bottom Layer w0.2: v1(53.525,72.259) v1(53.525,118.2)
NetR6_1: R6.1 ToF1.2 ToF2.2 U4.41 | length 111.6
  Top Layer w0.2: ToF1.2 8.955,101.585 12.185,101.585 13.92,99.85 16.55,99.85 16.75,99.65 19.714,99.65 19.939,99.875 22.903,99.875 24.328,101.3 v1(65.9,101.3) ; v1(65.9,109.6) 66.7,110.4 v1(84,110.4) ; v1(87.2,110.4) 87.22,110.38 91.28,110.38 U4.41@91.3,110.36
  Bottom Layer w0.2: ToF2.2 6.3,88.24 6.3,101.76 ToF1.2 ; v1(65.9,101.3) v1(65.9,109.6) ; v1(84,110.4) R6.1 85.6,110.4 85.7,110.3 85.8,110.4 v1(87.2,110.4)
NetR7_1: R7.1 ToF1.4 ToF2.4 U4.21 | length 49
  Top Layer w0.2: ToF2.4 9.26,84.46 10.023,85.223 v1(10.023,86.942) 12.505,89.425 22.73,89.425 24.655,87.5 U4.21@30.34,87.5 ; ToF1.4 8.84,100.46 v1(10.1,99.2)
  Bottom Layer w0.2: v1(10.023,86.942) v1@10.023,99.126 ; v1(10.1,99.2) 10.3,99 v1@10.3,98.924 ; U4.21@30.34,87.5 30.506,87.666 31.49,87.666 32.424,88.6 33.362,88.6 34.462,87.5 36,87.5 R7.1
NetR8_1: R8.1 ToF3.2 U4.63 | length 97.3
  Top Layer w0.2: ToF3.2 9.04,72.5 22.8,72.5 23.8,73.5 v1(70.3,73.5) ; v1(70.3,84.8) 83.54,84.8 85.92,82.42 91.3,82.42 U4.63@91.466,82.586
  Bottom Layer w0.2: v1(70.3,73.5) v1(70.3,84.8)
NetR10_2: R10.2 ToF3.4 U4.69 | length 101.9
  Top Layer w0.2: ToF3.4 9.38,70.3 24.343,70.3 25.271,69.371 v1(25.7,69.371) ; v1(25.7,65.1) 28.1,65.1 28.8,65.8 72.5,65.8 74.3,67.6 87.8,67.6 v1(88.55,68.35) ; R10.2 86.6,74.8 U4.69@91.3,74.8 ; v1(88.5,73.6) 90.18,73.6 U4.69
  Bottom Layer w0.2: v1(25.7,65.1) v1(25.7,69.371) ; v1(88.5,73.6) 88.55,73.55 v1(88.55,68.35)
NetR12_1: R12.1 U4.32 | length 3.2
  Bottom Layer w0.2: U4.32 32.96,74.8 R12.1
NetR13_1: R13.1 U4.30 | length 3.2
  Bottom Layer w0.2: U4.30 36.02,77.28 R13.1
NetRadio_12: Radio.12 U4.57 | length 131.3
  Top Layer w0.2: Radio.12 16.72,31.2 43.5,31.2 48.2,35.9 48.2,42.5 v4(47.3,43.4) ; v1(48.2,85.6) 48.2,85.7 49.2,86.7 71.8,86.7 75.14,90.04 U4.57@91.3,90.04
  Bottom Layer w0.2: v4(47.3,43.4) 47.3,84.7 v1(48.2,85.6)
NetSFRONT_1: SFRONT.1 U4.28 | length 120.1
  Top Layer w0.2: U4.28@32.88,79.88 72.32,79.88 v1(73,79.2)
  Bottom Layer w0.2: v1(73,79.2) 72.25,78.45 72.25,52.972 73.914,51.308 73.914,37.086 83.13,27.87 90.57,27.87 SFRONT.1@101.95,16.49
NetSREAR_1: SREAR.1 U4.51 | length 81.1
  Top Layer w0.2: v2(98.5,80) 101.331,80 v2(104.394,76.937)
  Bottom Layer w0.2: U4.51 92.62,96.3 95.6,96.3 97.2,94.7 97.2,81.2 98.4,80 v2(98.5,80)
  Bottom Layer w0.4: SREAR.1 102.88,31.08 106.172,34.372 106.172,41.402 104.648,42.926 104.648,48.006 106.172,49.53 106.172,52.372 107,53.2 107,75.626 105.689,76.937 v2(104.394,76.937)
NetToF1_3: ToF1.3 ToF3.3 U4.60 | length 165.8
  Top Layer w0.2: ToF1.3 2.26,100.46 v1(2.1,100.3) 2.1,103.5 15,116.4 40.6,116.4 42.6,114.4 v1(74.8,114.4) ; v1(74.8,105.5) v1(89.2,105.5)
  Bottom Layer w0.2: v1(2.1,100.3) 2.6,99.8 2.6,96.206 3.81,94.996 3.81,88.9 2.6,87.69 2.6,79.696 3.81,78.486 3.81,72.644 2.6,71.434 2.6,69.5 3.64,68.46 ToF3.3 ; v1(74.8,105.5) v1(74.8,114.4) ; v1(89.2,105.5) 89.2,89.4 89.9,88.7 92.6,88.7 U4.60
NetToF2_3: ToF2.3 U4.62 | length 127.4
  Top Layer w0.2: v1(9.8,103.3) 12.1,105.6 v1(26.2,105.6) ; v1(28,86.2) 37.588,86.2 39.288,84.5 48.7,84.5 50.26,86.06 91.756,86.06 92.69,85.126 93.674,85.126 93.84,84.96 U4.62@93.86,84.98
  Bottom Layer w0.2: ToF2.3 5.9,85.36 6.24,85.7 8.6,85.7 9.2,86.3 9.2,102.7 v1(9.8,103.3) ; v1(26.2,105.6) 27.3,104.5 27.3,86.9 v1(28,86.2)
"SPI1 MISO": P2.8 U4.65 | length 112.4
  Top Layer w0.2: P2.8 19.46,60 73.7,60 v1(74.5,60.8) ; v1(74.5,79.2) 75.18,79.88 U4.65@91.3,79.88
  Bottom Layer w0.2: v1(74.5,60.8) 75.488,61.788 75.488,73.303 75.488,73.403 ccw(c75.261,73.403) 75.261,73.63 74.441,73.63 cw(c74.441,73.857) 74.441,74.084 76.88,74.084 ccw(c76.88,74.311) 76.88,74.538 74.441,74.538 cw(c74.441,74.765) 74.441,74.992 76.88,74.992 ccw(c76.88,75.219) 76.88,75.446 74.441,75.446 cw(c74.441,75.673) 74.441,75.9 76.88,75.9 ccw(c76.88,76.127) 76.88,76.354 74.441,76.354 cw(c74.441,76.581) 74.441,76.808 75.893,76.808 ccw(c75.893,77.035) 75.893,77.262 75.715,77.262 cw(c75.715,77.489) 75.488,77.489 75.488,78.212 74.7,79 v1(74.5,79.2)
"SPI1 MOSI": P2.6 U4.53 | length 112.5
  Top Layer w0.2: P2.6 18.776,63.224 56.476,63.224 v1(56.6,63.1) ; v1(58.5,90.5) 67.245,90.5 67.345,90.5 ccw(c67.345,90.727) 67.572,90.727 67.572,91.035 cw(c67.799,91.035) 68.026,91.035 68.026,89.965 ccw(c68.253,89.965) 68.48,89.965 68.48,91.035 cw(c68.707,91.035) 68.934,91.035 68.934,89.965 ccw(c69.161,89.965) 69.388,89.965 69.388,91.035 cw(c69.615,91.035) 69.842,91.035 69.842,89.965 ccw(c70.069,89.965) 70.296,89.965 70.296,91.035 cw(c70.523,91.035) 70.75,91.035 70.75,89.965 ccw(c70.977,89.965) 71.204,89.965 71.204,90.859 cw(c71.431,90.859) 71.658,90.859 71.658,90.727 ccw(c71.885,90.727) 71.885,90.5 72.475,90.5 73.245,91.27 76.825,94.85 91.03,94.85 U4.53@91.3,95.12
  Bottom Layer w0.2: v1(56.6,63.1) 57.5,64 57.5,89.5 v1(58.5,90.5)
"SPI1 SCK": P2.5 U4.49 | length 112.4
  Top Layer w0.2: P2.5 17.16,62.3 v1(49.5,62.3) ; v1(50.8,99.3) 51.7,100.2 U4.49@91.3,100.2
  Bottom Layer w0.2: v1(49.5,62.3) 50.8,63.6 v1(50.8,99.3)
"SPI2 MISO": P3.8 U4.35 | length 97.5
  Top Layer w0.2: P3.8@18.54,95.92 18.63,96.01 19.5,96.01 19.6,96.01 ccw(c19.6,96.237) 19.827,96.237 19.827,96.468 cw(c20.054,96.468) 20.281,96.468 20.281,92.542 ccw(c20.508,92.542) 20.735,92.542 20.735,96.468 cw(c20.962,96.468) 21.189,96.468 21.189,92.542 ccw(c21.416,92.542) 21.643,92.542 21.643,96.468 cw(c21.87,96.468) 22.097,96.468 22.097,92.542 ccw(c22.324,92.542) 22.551,92.542 22.551,96.468 cw(c22.778,96.468) 23.005,96.468 23.005,92.542 ccw(c23.232,92.542) 23.459,92.542 23.459,96.468 cw(c23.686,96.468) 23.913,96.468 23.913,92.542 ccw(c24.14,92.542) 24.367,92.542 24.367,96.468 cw(c24.594,96.468) 24.821,96.468 24.821,95.473 ccw(c25.048,95.473) 24.887,95.313 v1(25.5,94.7) ; v1(25.5,70.8) 26.58,69.72 U4.35@30.34,69.72
  Bottom Layer w0.2: v1(25.5,70.8) 25.5,71.25 25.5,71.35 ccw(c25.273,71.35) 25.273,71.577 25.177,71.577 cw(c25.177,71.804) 25.177,72.031 25.549,72.031 ccw(c25.549,72.258) 25.549,72.485 25.177,72.485 cw(c25.177,72.712) 25.177,72.939 25.63,72.939 ccw(c25.63,73.166) 25.63,73.393 25.177,73.393 cw(c25.177,73.62) 25.177,73.847 25.63,73.847 ccw(c25.63,74.074) 25.63,74.301 25.177,74.301 cw(c25.177,74.528) 25.177,74.755 25.63,74.755 ccw(c25.63,74.982) 25.63,75.209 25.177,75.209 cw(c25.177,75.436) 25.177,75.663 25.63,75.663 ccw(c25.63,75.89) 25.63,76.117 25.177,76.117 cw(c25.177,76.344) 25.177,76.571 25.63,76.571 ccw(c25.63,76.798) 25.63,77.025 25.177,77.025 cw(c25.177,77.252) 25.177,77.479 25.63,77.479 ccw(c25.63,77.706) 25.63,77.933 25.177,77.933 cw(c25.177,78.16) 25.177,78.387 25.63,78.387 ccw(c25.63,78.614) 25.63,78.841 25.177,78.841 cw(c25.177,79.068) 25.177,79.295 25.63,79.295 ccw(c25.63,79.522) 25.63,79.749 25.177,79.749 cw(c25.177,79.976) 25.177,80.203 25.273,80.203 ccw(c25.273,80.43) 25.5,80.43 25.5,81.25 25.5,85 25.5,85.1 ccw(c25.273,85.1) 25.273,85.327 25.177,85.327 cw(c25.177,85.554) 25.177,85.781 25.273,85.781 ccw(c25.273,86.008) 25.273,86.235 25.177,86.235 cw(c25.177,86.462) 25.177,86.689 25.273,86.689 ccw(c25.273,86.916) 25.273,87.143 25.177,87.143 cw(c25.177,87.37) 25.177,87.597 25.273,87.597 ccw(c25.273,87.824) 25.273,88.051 25.177,88.051 cw(c25.177,88.278) 25.177,88.505 25.273,88.505 ccw(c25.273,88.732) 25.273,88.959 25.177,88.959 cw(c25.177,89.186) 25.177,89.413 25.273,89.413 ccw(c25.273,89.64) 25.273,89.867 25.238,89.867 cw(c25.238,90.094) 25.238,90.321 25.273,90.321 ccw(c25.273,90.548) 25.5,90.548 25.5,93.5 v1(25.5,94.7)
"SPI2 MOSI": P3.6 U4.36 | length 97.5
  Top Layer w0.2: P3.6@18.54,98.46 18.57,98.43 20.25,98.43 20.35,98.43 ccw(c20.35,98.657) 20.577,98.657 20.577,99.298 cw(c20.804,99.298) 21.031,99.298 21.031,97.622 ccw(c21.258,97.622) 21.485,97.622 21.485,99.298 cw(c21.712,99.298) 21.939,99.298 21.939,97.622 ccw(c22.166,97.622) 22.393,97.622 22.393,99.298 cw(c22.62,99.298) 22.847,99.298 22.847,97.622 ccw(c23.074,97.622) 23.301,97.622 23.301,99.473 cw(c23.528,99.473) 23.755,99.473 23.755,97.622 ccw(c23.982,97.622) 24.209,97.622 24.209,99.473 cw(c24.436,99.473) 24.663,99.473 24.663,98.657 ccw(c24.89,98.657) 24.89,98.43 25.47,98.43 v1(25.5,98.4) ; v1(26.207,71.507) 26.894,70.82 31.78,70.82 U4.36@32.88,69.72
  Bottom Layer w0.2: v1(25.5,98.4) 26.15,97.75 26.207,97.693 26.207,97.65 ccw(c26.434,97.65) 26.434,97.423 26.723,97.423 cw(c26.723,97.196) 26.723,96.969 25.177,96.969 ccw(c25.177,96.742) 25.177,96.515 26.723,96.515 cw(c26.723,96.288) 26.723,96.061 25.177,96.061 ccw(c25.177,95.834) 25.177,95.607 26.723,95.607 cw(c26.723,95.38) 26.723,95.153 26.402,95.153 ccw(c26.402,94.926) 26.402,94.699 26.723,94.699 cw(c26.723,94.472) 26.723,94.245 26.227,94.245 ccw(c26.227,94.018) 26.227,93.791 26.723,93.791 cw(c26.723,93.564) 26.723,93.337 26.077,93.337 ccw(c26.077,93.11) 26.077,92.883 26.723,92.883 cw(c26.723,92.656) 26.723,92.429 26.077,92.429 ccw(c26.077,92.202) 26.077,91.975 26.723,91.975 cw(c26.723,91.748) 26.723,91.521 26.077,91.521 ccw(c26.077,91.294) 26.077,91.067 26.723,91.067 cw(c26.723,90.84) 26.723,90.613 26.077,90.613 ccw(c26.077,90.386) 26.077,90.159 26.723,90.159 cw(c26.723,89.932) 26.723,89.705 26.077,89.705 ccw(c26.077,89.478) 26.077,89.251 26.723,89.251 cw(c26.723,89.024) 26.723,88.797 26.077,88.797 ccw(c26.077,88.57) 26.077,88.343 26.723,88.343 cw(c26.723,88.116) 26.723,87.889 26.077,87.889 ccw(c26.077,87.662) 26.077,87.435 26.723,87.435 cw(c26.723,87.208) 26.723,86.981 26.077,86.981 ccw(c26.077,86.754) 26.077,86.527 26.951,86.527 cw(c26.951,86.3) 26.951,86.073 26.077,86.073 ccw(c26.077,85.846) 26.077,85.619 27.25,85.619 cw(c27.25,85.392) 27.25,85.165 26.077,85.165 ccw(c26.077,84.938) 26.077,84.711 27.25,84.711 cw(c27.25,84.484) 27.25,84.257 26.077,84.257 ccw(c26.077,84.03) 26.077,83.803 27.25,83.803 cw(c27.25,83.576) 27.25,83.349 26.077,83.349 ccw(c26.077,83.122) 26.077,82.895 27.039,82.895 cw(c27.039,82.668) 27.039,82.441 26.207,82.441 ccw(c26.207,82.214) 26.207,81.987 26.434,81.987 cw(c26.434,81.76) 26.434,81.533 ccw(c26.434,81.306) 26.207,81.306 26.207,80.5 v1(26.207,71.507)
"SPI2 SCK": P3.5 U4.68 | length 97.6
  Top Layer w0.2: P3.5@16,98.46 17.415,97.045 25.343,97.045 25.988,96.4 62.5,96.4 v1(63.3,97.2) ; v1(64,78.9) 64.105,78.9 64.565,78.44 91.756,78.44 92.69,77.506 93.674,77.506 U4.68@93.84,77.34
  Bottom Layer w0.2: v1(63.3,97.2) 63.4,97.2 64,96.6 v1(64,78.9)
"SPI3 MOSI": P2.15 P3.15 U4.3 | length 82.2
  Top Layer w0.2: P2.15 16.226,50.986 17.175,50.986 18.364,52.175 23.33,52.175 25.275,54.12 25.275,54.68 23.955,56 v1(23.8,56) ; P3.15@16,85.76 17.16,84.6 v1(23.7,84.6) ; v1(23.8,109.8) 24.46,110.46 U4.3@30.46,110.46
  Bottom Layer w0.2: v1(23.8,56) 23.75,56.05 23.75,84.55 v1(23.7,84.6) 23.75,84.65 23.75,109.75 v1(23.8,109.8)
"SPI3 SCK": P2.16 P3.16 U4.1 | length 83.8
  Top Layer w0.2: P3.16@18.54,85.76 18.62,85.68 22.22,85.68 v1(22.3,85.6) ; v1(22.2,112.4) 22.2,112.433 22.767,113 23.903,113 24.003,113 ccw(c24.003,113.227) 24.23,113.227 24.23,113.75 cw(c24.457,113.75) 24.684,113.75 24.684,112.68 ccw(c24.911,112.68) 25.138,112.68 25.138,113.75 cw(c25.365,113.75) 25.592,113.75 25.592,112.68 ccw(c25.819,112.68) 26.046,112.68 26.046,113.75 cw(c26.273,113.75) 26.5,113.75 26.5,112.817 ccw(c26.727,112.817) 26.954,112.817 26.954,113.227 cw(c27.181,113.227) 27.408,113.227 ccw(c27.635,113.227) 27.635,113 28.386,113 U4.1@30.46,113
  Bottom Layer w0.2: P2.16 22.3,54.52 v1(22.3,85.6) 22.25,85.65 22.25,112.35 v1(22.2,112.4)
VBATT: F1.1 MDBAT.2 P2.1 P2.3 P3.1 P3.3 SW1.2 | length 113.8
  Top Layer w0.6: MDBAT.2 8.75,54.8 13.2,59.25 v1(13.2,59.3) ; v1(13.2,65.9) 13.248,65.948 13.408,65.948 v1@13.46,66 ; P2.3 v1@13.46,66 ; P2.1 v1@13.46,66 ; P3.3@16,101 15.857,101.143 14.157,101.143 v1(12.6,102.7) 12.668,102.7 13.508,103.54 P3.1@16,103.54
  Top Layer w1.2: MDBAT.2 8.75,49.15 15.3,42.6 v1(20.1,42.6) ; v1(27.4,37.6) SW1.2 44.884,37.6 45.984,38.7 F1.1
  Bottom Layer w0.6: v1(12.6,102.7) 11.6,101.7 11.6,96.137 11.15,95.687 11.15,84.787 12.275,83.662 12.275,75.925 13.2,75 v1(13.2,65.9) v1(13.2,59.3)
  Bottom Layer w1.2: v1(20.1,42.6) 25.1,37.6 v1(27.4,37.6)
VSERVO1: BUCK1.5 BUCK1.6 SFRONT.2 | length 52.6
  Top Layer w1.2: BUCK1.5@55.515,-2.587 BUCK1.6@57.293,-2.587 ; BUCK1.6 65.722,5.08 90.678,5.08 99.598,14 SFRONT.2
VSERVO2: BUCK2.5 BUCK2.6 SREAR.2 | length 58.5
  Top Layer w1.2: BUCK2.5 BUCK2.6 84.968,-3.95 91.95,-3.95 102.175,6.275 104.8,6.275 107.25,8.725 107.25,24.325 103.035,28.54 SREAR.2@101.924,28.54
pads on no net: "Inertial Sensor.3" "Inertial Sensor.6" "Inertial Sensor.7" "Inertial Sensor.8" "Inertial Sensor.9" "Inertial Sensor.10" "Inertial Sensor.11" "Inertial Sensor.12" "Inertial Sensor.15" "Inertial Sensor.16" "Inertial Sensor.17" "Inertial Sensor.18" "Inertial Sensor.23" "Inertial Sensor.24" B1.1 B1.3 B2.1 B2.3 Encoder.1 Encoder.2 GPIO.6 P4.1 P4.6 Radio.3 Radio.4 Radio.5 Radio.6 Radio.7 Radio.8 Radio.9 Radio.10 Radio.11 Radio.13 Radio.14 Radio.15 Radio.16 Radio.17 Radio.18 Radio.19 Radio.20 U3.4 U4.0 U4.5 U4.7 U4.9 U4.10 U4.11 U4.12 U4.13 U4.14 U4.15 U4.16 U4.18 U4.23 U4.24 U4.26 U4.29 U4.31 U4.33 U4.42 U4.45 U4.46 U4.48 U4.56 U4.72 U4.74 U4.76

## Polygon pours and split planes (outlines as drawn)
GND on Top Layer "top_GND" (solid, pour order 0): 0,123 110,123 110,-7 0,-7
GND on Bottom Layer "bottom_GND" (solid, pour order 1): 0,123 110,123 110,-7 0,-7

## Keep-outs
Keep-Out Layer:
  the board outline again, w1

## Silkscreen, mask and mechanical layers (free items; w line width, h text height)
Top Overlay:
  circle w0.254: c93.75,34.25 r0.8
  circle w0.254: c93.75,34.25 r0.224
  lines w0.2: 93.25,31.25 93.75,30.75 ; 94.25,31.25 93.75,30.75 ; 96.75,33.75 97.25,34.25 ; 96.75,34.75 97.25,34.25 ; 93.75,30.75 93.75,34.25 97.25,34.25
  text "z" at 91.504,34.004 h1.2
  text "y" at 96.504,32.404 h1.2
  text "x" at 94.904,30.804 h1.2
  text "ProbAUT 2.0" at 61.254,-5.246 h2
Mechanical 1:
  the board outline again, w1

## Text inside footprints (layer, text, board x,y; h text height)
"Motor connector": Top Overlay "csati fele" at 109.171,78.679 h1.2 r90
U4: Top Overlay "CN10" at 90.05,114.618 h1.52; Top Overlay "CN7" at 29.09,114.618 h1.52